# Altium PCB PCB1.PcbDoc
Units mm, origin at the board's own origin, x right, y up, seen from the top; angles counter-clockwise.
Board outline 20 x 20 mm, 2 copper layers (Top Layer, Bottom Layer); 4 components, 4 nets, 12 pads, 0 vias.
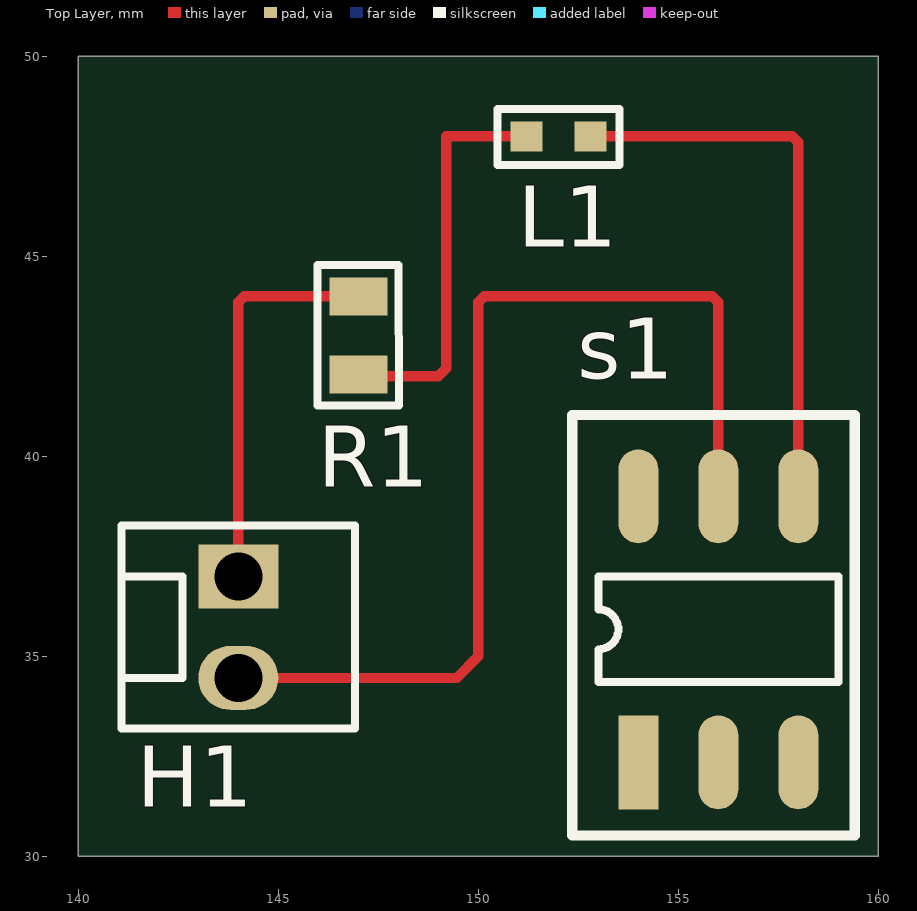
[diagram p0: Top Layer view]
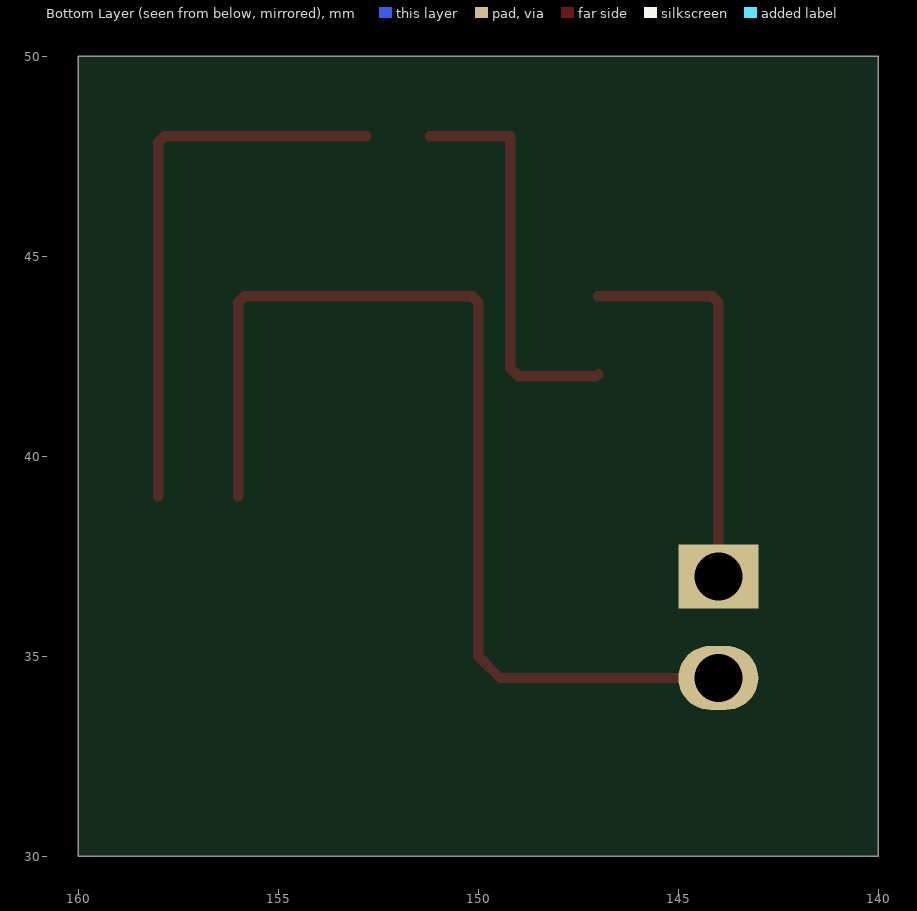
[diagram p1: Bottom Layer view, seen from below]
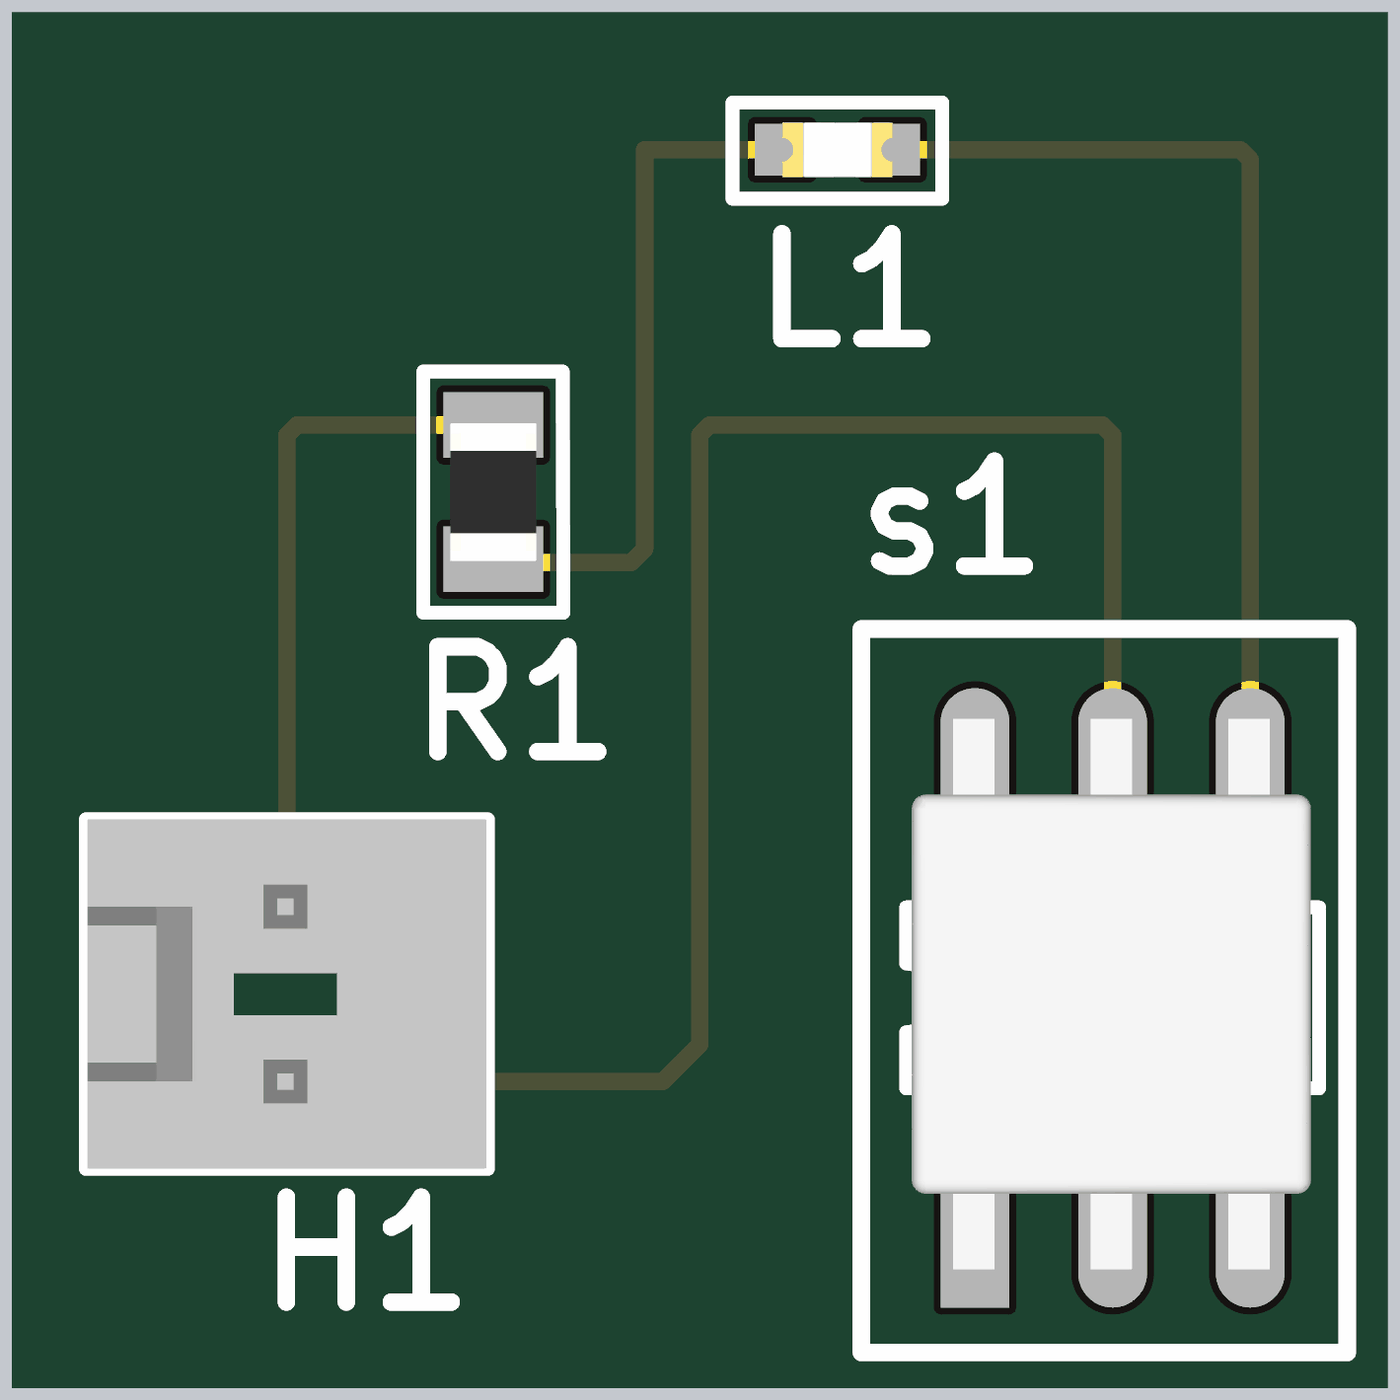
[diagram p2: 3D render of the assembled board from above, using the file's embedded part models]

## Layer stack, top to bottom
Top Solder: solder mask 0.0102, Solder Resist, Dk 3.5
Top Layer: signal copper 0.0356
Dielectric 1: dielectric 0.32, FR-4, Dk 4.8
Bottom Layer: signal copper 0.0356
Bottom Solder: solder mask 0.0102, Solder Resist, Dk 3.5

## Board outline
140,50 140,30 160,30 160,50

## Design rules (kind name [scope] priority, off if disabled: settings)
Clearance [All] p1: gap=0.2 ignorepadtopadclearanceinfootprint=FALSE
PolygonConnect [All] p1: connectstyle=Relief reliefconductorwidth=0.254 reliefentries=4 polygonreliefangle="90 Angle" airgapwidth=0.254
RoutingVias [All] p1: holewidth=0.711 width=1.27 viastyle="Through Hole" minholewidth=0.711 minwidth=1.27 maxholewidth=0.711 maxwidth=1.27
SolderMaskExpansion [All] p1: expansion=0.102 istentingtop=FALSE
Width [All] p1: maxlimit=0.254 minlimit=0.254 preferedwidth=0.254
30 further rules are at their usual default settings.

## Classes and differential pairs
component class Sheet2: L? s?

## Components (designator, comment, footprint, x,y, rotation, side; value= is the part's Value field where it differs from the comment)
H1 "header" HDR1X2 144,35.73 r0 top
L1 "LED" LED 152,48 r0 top
R1 "360r" R0805 147,43.025 r90 top value=360R
s1 "switch" 3 154,32.35 r90 top

## Footprints (in the part's own frame and the unit in brackets; to place one, negate y for a bottom-side part, rotate by r counter-clockwise, add the part's x,y. Pads: shape width x height; smd on the part's side, far side on the other; paste and mask are expansions set on the pad)
3 [mm]
  rect 2.35x1 smd: 1(0,0)
  oval 2.35x1 smd: 2(0,-2) 3(0,-4) 4(6.65,-4) 5(6.65,-2) 6(6.65,0)
  silkscreen extent -1.83,-5.41 8.69,1.65, body extent -0.62,-4.88 7.38,0.92, height 7.9
HDR1X2 [mm]
  rect 2x1.6 hole 1.2: 1(0,1.27)
  oval 2x1.6 hole 1.2: 2(0,-1.27)
  silkscreen extent -2.92,-2.54 2.92,2.54, body extent -2.9,-2.54 2.9,2.54, height 11.9
LED [mm]
  rect 0.8x0.75 smd: 1(-0.8,0) 2(0.8,0)
  silkscreen extent -1.52,-0.71 1.52,0.69, body extent -0.8,-0.4 0.8,0.4, height 0.4
R0805 [mm]
  rect 0.95x1.45 smd: 1(-0.975,0) 2(0.975,0)
  silkscreen extent -1.75,-1.02 1.75,1.02, body extent -1,-0.63 1,0.63, height 0.6

## Part data
H1: library part 0022292021, "Board Connector, 2 Contact(s), 1 Row(s), Male, Straight, Solder Terminal", Manufacturer=Molex, Supplier Part Number=538-22-29-2021, Category=connectors, Manufacturer Part Number=0022292021, Pricing="1=0.46, 10=0.314, 50=0.314, 100=0.264, 1000=0.252, 10000=0.201 (USD)", RoHS=No, Stock=4585, Supplier=Mouser
L1: library part 732-12017-2-ND, "Single Color LED, Cool White, 2.6mm", Manufacturer=Cree, Manufacturer Part Number=JB3030AWT-P-H65EA0000-N0000001, Supplier Part Number=2138-JB3030AWT-P-H65EA0000-N0000001CT-ND, Category=LEDs, Pricing="1=0.1, 10=0.085, 100=0.0753, 500=0.06218, 1000=0.05563 (USD)", RoHS=Yes, Stock=65459, Supplier=Digikey
R1: library part CRCW0805360RFKEA, "Fixed Resistor, Metal Glaze/thick Film, 0.125W, 360ohm, 150V, 1% +/-Tol, 100ppm/Cel, Surface Mount, 0805", Case/Package=0805, Manufacturer=Vishay, Max Operating Temperature=155°C, Min Operating Temperature=-55°C, Package Height=0.45mm, Package Length=2mm, Package Shape=Rectangular, Package Style=SMTMeter, Package Width=1.25mm, Power=125mW, Rated Temperature=70°C, Resistor Type="FIXED RESISTOR", Supplier Part Number=71-CRCW0805360RFKEA, Temperature Coefficient=100ppm/°C, Tolerance=1%, Working Voltage=150V, Category="Chip SMD Resistors", ComponentLink1Description=https://datasheet.ciiva.com:443/pdfs/VipMasterIC/IC/VISH/VISH-S-A0007266705/VISH-S-A0007266705-1.pdf?src-supplier=IHS+Markit, ComponentLink1URL=https://datasheet.ciiva.com:443/pdfs/VipMasterIC/IC/VISH/VISH-S-A0007266705/VISH-S-A0007266705-1.pdf?src-supplier=IHS+Markit, ComponentLink2Description=https://datasheet.ciiva.com/2467/dcrcwe3-2467773.pdf?src-supplier=Digikey, ComponentLink2URL=https://datasheet.ciiva.com/2467/dcrcwe3-2467773.pdf?src-supplier=Digikey, Construction=Chip, JESD-609 Code=e3, Manufacturer Part Number=CRCW0805360RFKEA, Mounting Technology="Surface Mount", Packaging="Tape and Reel", Pins=2, Pricing="1=0.1, 10=0.025, 50=0.025, 100=0.015, 1000=0.012, 10000=0.008 (USD)", Reach SVHC Compliant=Yes, Reference Standard=AEC-Q200, RoHS=Yes, RoHS Compliant=Yes, Stock=921, Supplier=Mouser, Technology="METAL GLAZE/THICK FILM", Terminal Finish=Nickel, Termination=Wraparound
s1: library part G3T12AB, "Toggle Switch, SPDT, On-on, Horizontal, 9 PCB Hole Cnt, Solder Terminal, Toggle Column Actuator, Surface Mount-straight", Contact DC Max Power Rating R Load=0.4VA@28VDC, Contact Resistance=0.08mR, Dielectric Withstand Volts=500VACV, Insulation Resistance=500MR, Manufacturer="NKK Switches", Manufacturer Series=G3, Max Operating Temperature=70°C, Min Operating Temperature=-25°C, Supplier Part Number=360-3268-ND, Actuator Angle=28°, Actuator Length=0.15inch, Actuator Material=Polyphenylene, Actuator Type=Toggle, Body Breadth=5.0038inch, Body Height=12.9032mm, Body Length or Diameter=10.9982mm, Bushing Diameter=0.157inch, Bushing Length=0.059inch, Category="Toggle Switches", Center Contact Plating=Gold, ComponentLink1Description=https://datasheet.ciiva.com:443/pdfs/VipMasterIC/IC/NKSW/NKSWS00071/NKSWS00071-1.pdf?src-supplier=IHS+Markit, ComponentLink1URL=https://datasheet.ciiva.com:443/pdfs/VipMasterIC/IC/NKSW/NKSWS00071/NKSWS00071-1.pdf?src-supplier=IHS+Markit, ComponentLink2Description=https://datasheet.ciiva.com/28398/1783573-28398363.pdf?src-supplier=Element14, ComponentLink2URL=https://datasheet.ciiva.com/28398/1783573-28398363.pdf?src-supplier=Element14, Contact Function=On-On, Contact Material=Bronze, Electrical Life=50000Cycles, End Contact Material=Bronze, End Contact Plating=Gold, Housing Material=Polyphenylene, Insulation Material=Polyphenylene, JESD-609 Code=e4, Manufacturer Part Number=G3T12AB, Mounting Technology="Surface Mount", PCB Hole Count=9, Pricing="1=5.24, 10=4.519, 25=4.2616, 40=4.13475, 80=3.95475, 230=3.69478, 440=3.54341, 945=3.3727 (USD)", Reach SVHC Compliant=Yes, RoHS=Yes, RoHS Compliant=Yes, Sealing=EPOXY, Solderability=WAVE, Stock=11404, Supplier=Digikey, Switch Action=HORIZONTAL, Switch Function=SPDT, Switch Type=Toggle, Terminal Finish=Gold, Terminal Length=0inch, Terminal Material=Bronze, Termination=Solder

## Nets (pads, with @x,y where several pads share a name; then routed paths per layer and width w, separated by ;. In a path a pad name is that pad's centre, name@x,y a point inside that pad or via, vN(x,y) a via of type N, cw(c..) or ccw(c..) an arc to the next point about the centre after c; other vN are vias at no path point)
GND: H1.2 s1.5 | length 26
  Top Layer w0.254: H1.2 149.46,34.46 150,35 150,43.851 150.149,44 155.851,44 156,43.851 s1.5
"Net  H1_1": H1.1 R1.2 | length 9.9
  Top Layer w0.254: H1.1 144,43.851 144.149,44 R1.2
NetL1_1: L1.1 R1.1 | length 10.1
  Top Layer w0.254: R1.1 147.05,42 149,42 149.2,42.2 149.2,48 L1.1
NetL1_2: L1.2 s1.4 | length 14.1
  Top Layer w0.254: L1.2 157.851,48 158,47.851 s1.4
pads on no net: s1.1 s1.2 s1.3 s1.6